# EAGLE board ATVS 1U PANEL (EAGLE 7.7.0)
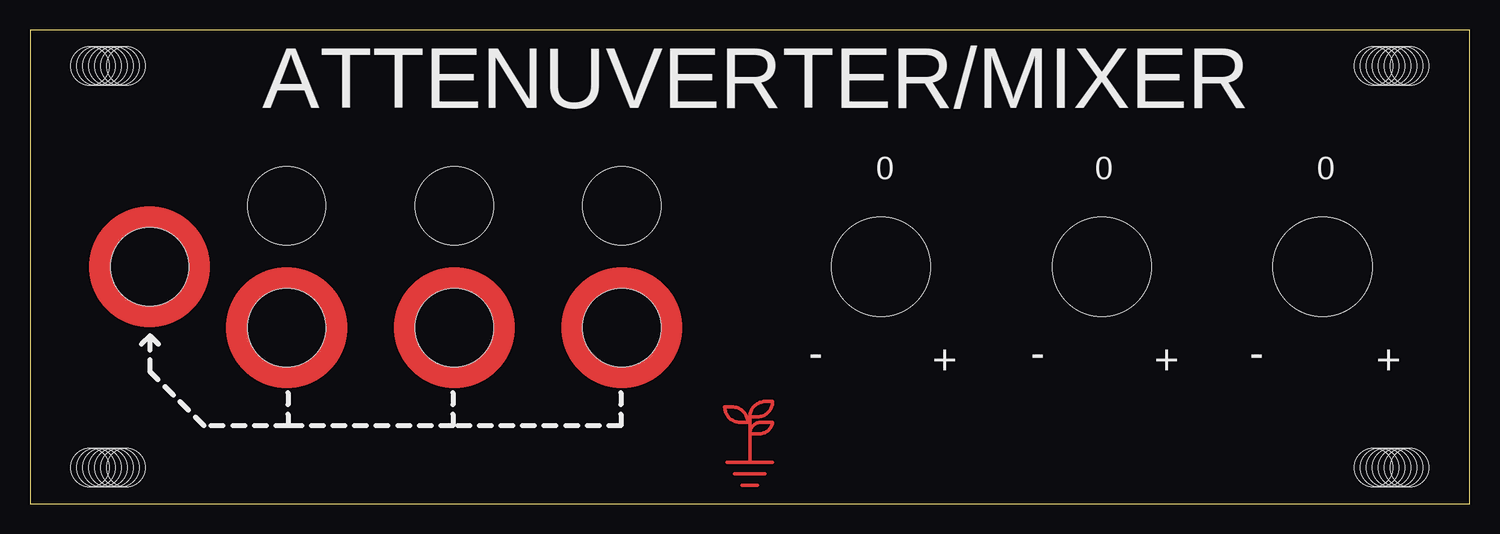
[diagram p0: board, top side]
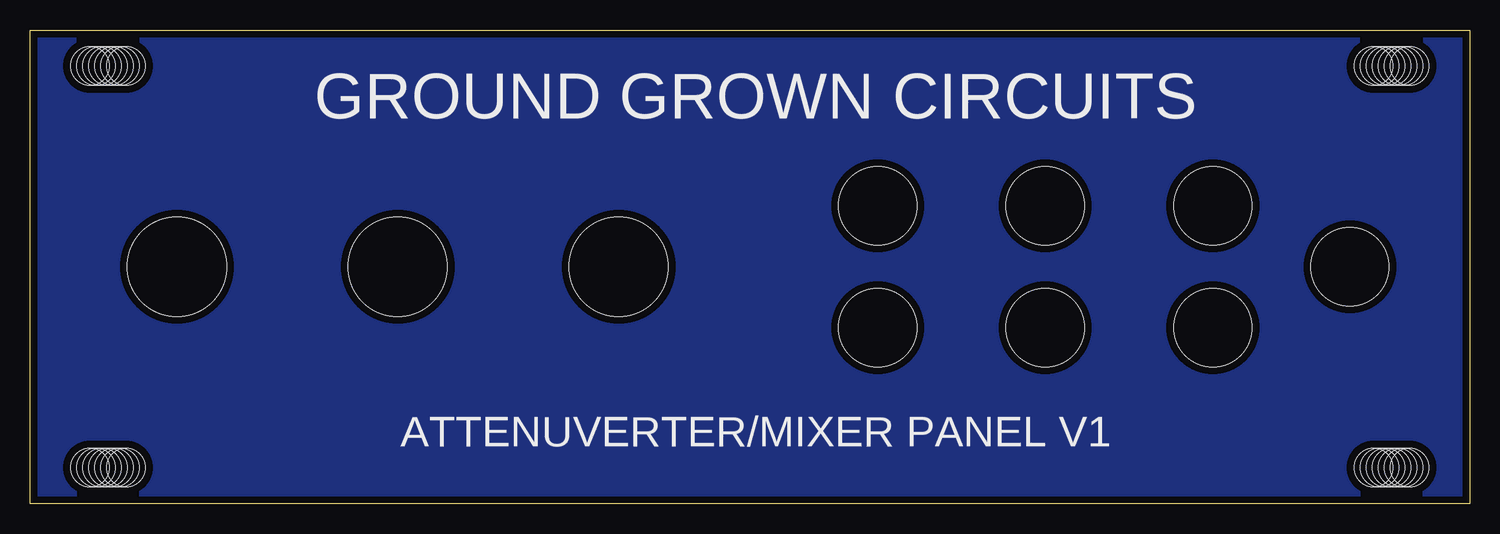
[diagram p1: board, bottom side, seen from below]

Size 120 x 39.5 mm. Coordinates in mm from the lower left corner, seen from the top.
Outline: 0,0 120,0 120,39.5 0,39.5 0,0
Copper layers (1*16): Top 0.035mm / dielectric 1.5mm / Bottom 0.035mm
Design rules "SparkFun": minimum track width 8mil, minimum drill 20mil, track to track 8mil, track to pad 8mil, pad to pad 8mil, via to via 8mil, smd to smd 8mil, copper to edge 8mil, drill to drill 8mil, minimum pad ring 12mil, minimum via ring 10mil, stop-mask expansion 4mil, vias tented up to drill 20mil, thermal gap 10mil

## Footprints (pad centres in the part's own frame; a part is rotated, then mirrored left to right if it is on the bottom)
MOUNT_DRILL = hole 3.2: 3,8; 3,7.5; 3,7; 3,6.5; 3,6; 3,5.5; 3,5
JACK_DRILL = hole 6.5: 0,0
JACK_DRILL_COPPER_SM = hole 6.5: 0,0
POT_DRILL = hole 8.25: 0,0

## Placement (x,y rotation side)
E$1  [MOUNT_DRILL]  0,39.5 270 top
E$2  [MOUNT_DRILL]  120,39.5 270 bottom
E$3  [MOUNT_DRILL]  120,0 90 top
E$4  [MOUNT_DRILL]  0,0 90 bottom
E$5  [LOGO_SMALL_COPPER]  60,3.5 0 top
IN1  [JACK_DRILL]  49.34,24.83 90 top
IN2  [JACK_DRILL]  35.37,24.83 90 top
IN3  [JACK_DRILL]  21.4,24.83 90 top
MIX  [JACK_DRILL_COPPER_SM]  9.97,19.75 180 top
OUT1  [JACK_DRILL_COPPER_SM]  49.34,14.67 90 top
OUT2  [JACK_DRILL_COPPER_SM]  35.37,14.67 90 top
OUT3  [JACK_DRILL_COPPER_SM]  21.4,14.67 90 top
VR1  B100K  [POT_DRILL]  107.76,19.75 180 top
VR2  B100K  [POT_DRILL]  89.34,19.75 180 top
VR3  B100K  [POT_DRILL]  70.93,19.75 180 top

## Library data of the parts
E$1-E$5 IN1-IN3 MIX OUT1-OUT3 = GroundGrownCircuits
VR1-VR3 = GroundGrownCircuits; PROD_ID: RES-09177

## Tracks (layer width: path | path; a pad name or v marks a point on that pad's centre or on a via)
S$1
  pour Bottom (isolate 0.61): 0,0 120,0 120,39.5 0,39.5

## Text on the board
tPlace: ATTENUVERTER/MIXER | 0 | 0 | 0 | - | + | - | + | - | +
bPlace: GROUND GROWN CIRCUITS | ATTENUVERTER/MIXER PANEL V1